# Altium PCB DM0249.PcbDoc (part 1 of 2)
Units mm, origin at the board's own origin, x right, y up, seen from the top; angles counter-clockwise.
Board outline 25 x 23.86 mm, 4 copper layers (Top Copper, Signal Layer 1, Layer 1, Bottom Layer), stack 1.602 mm thick; 50 components, 26 nets, 168 pads, 141 vias.
Unrouted connection lines stored in the file: 117.
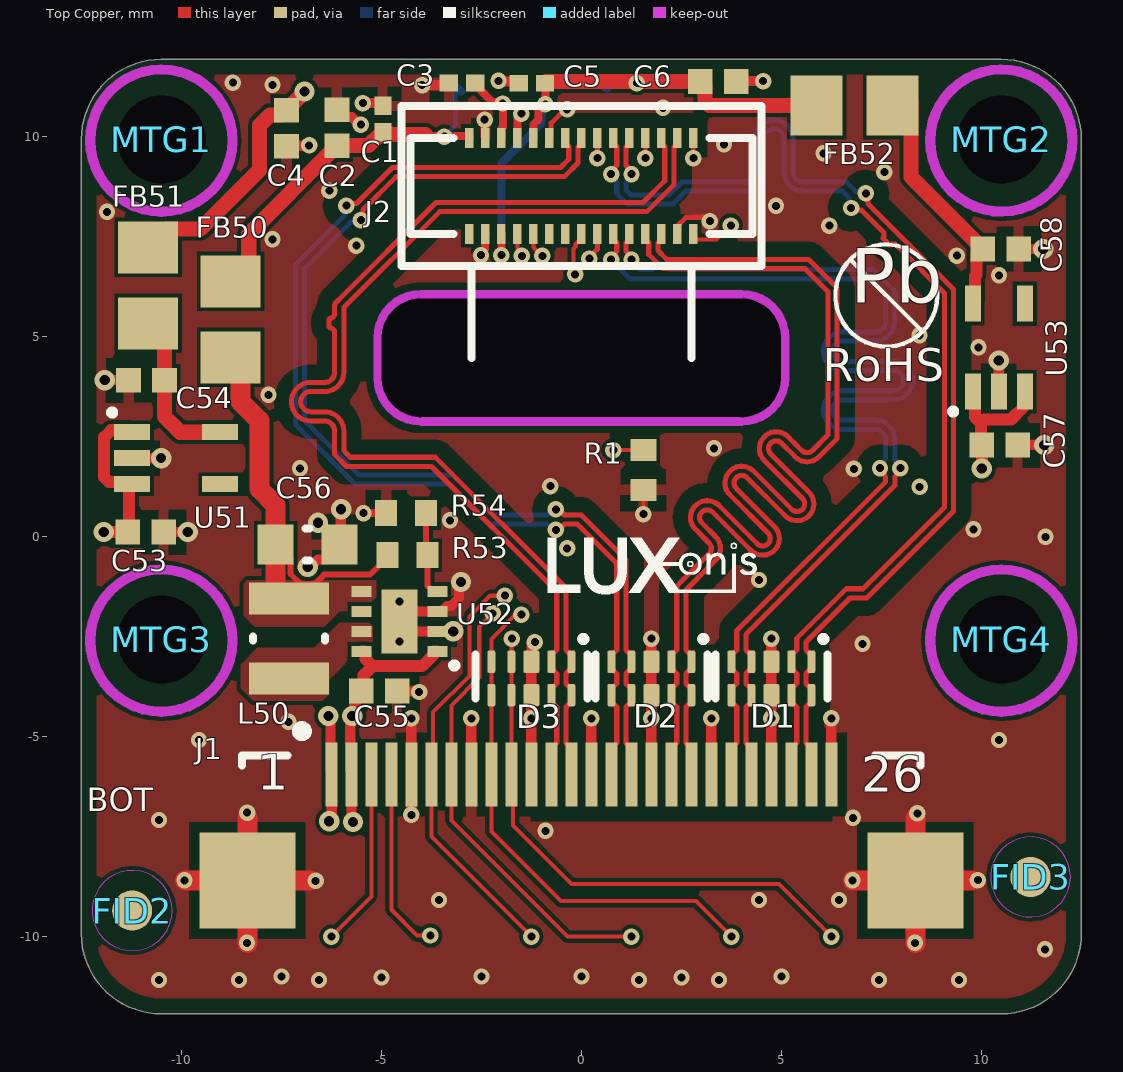
[diagram p0: Top Copper view]
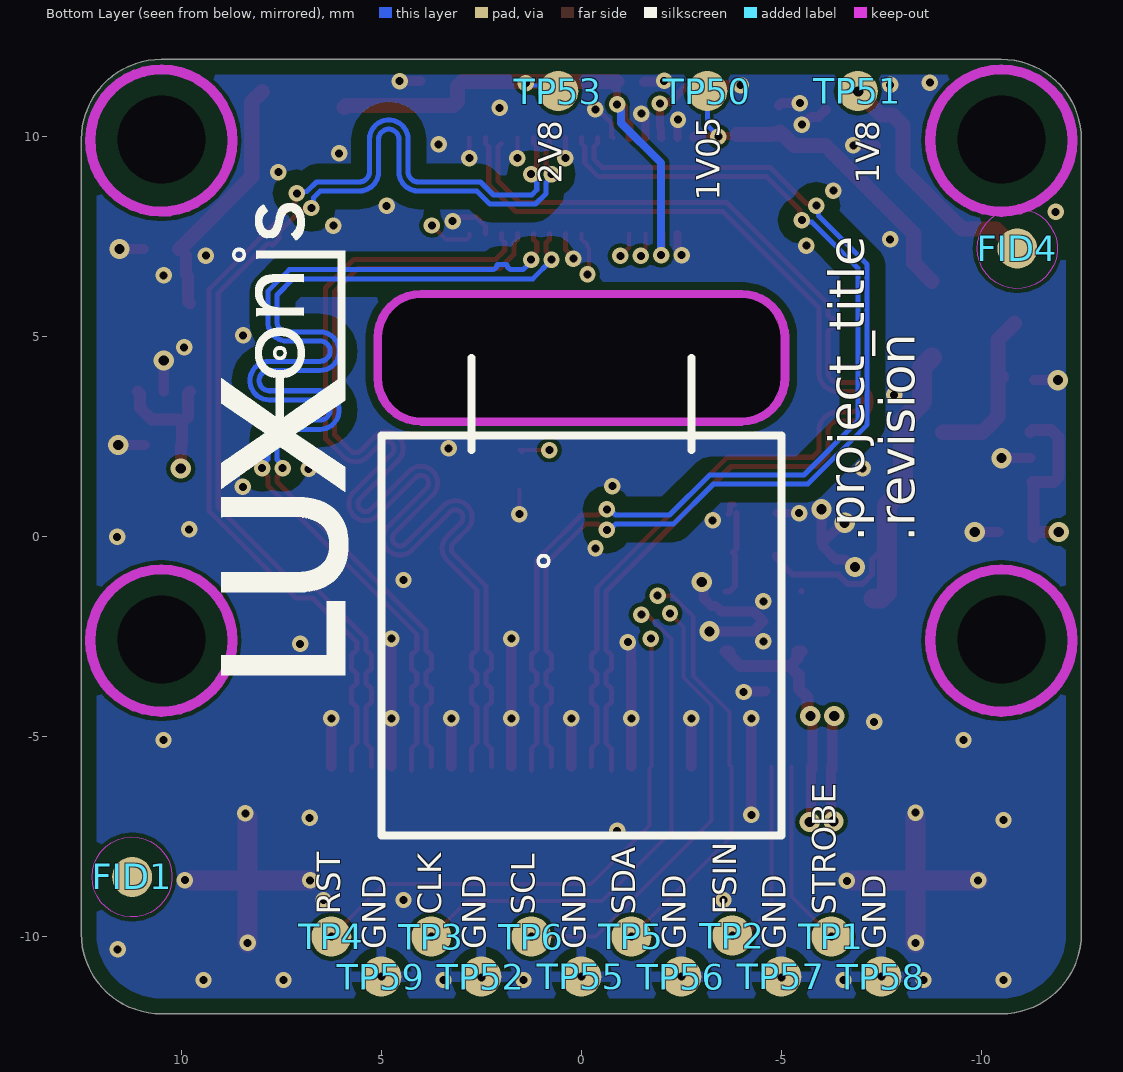
[diagram p1: Bottom Layer view, seen from below]
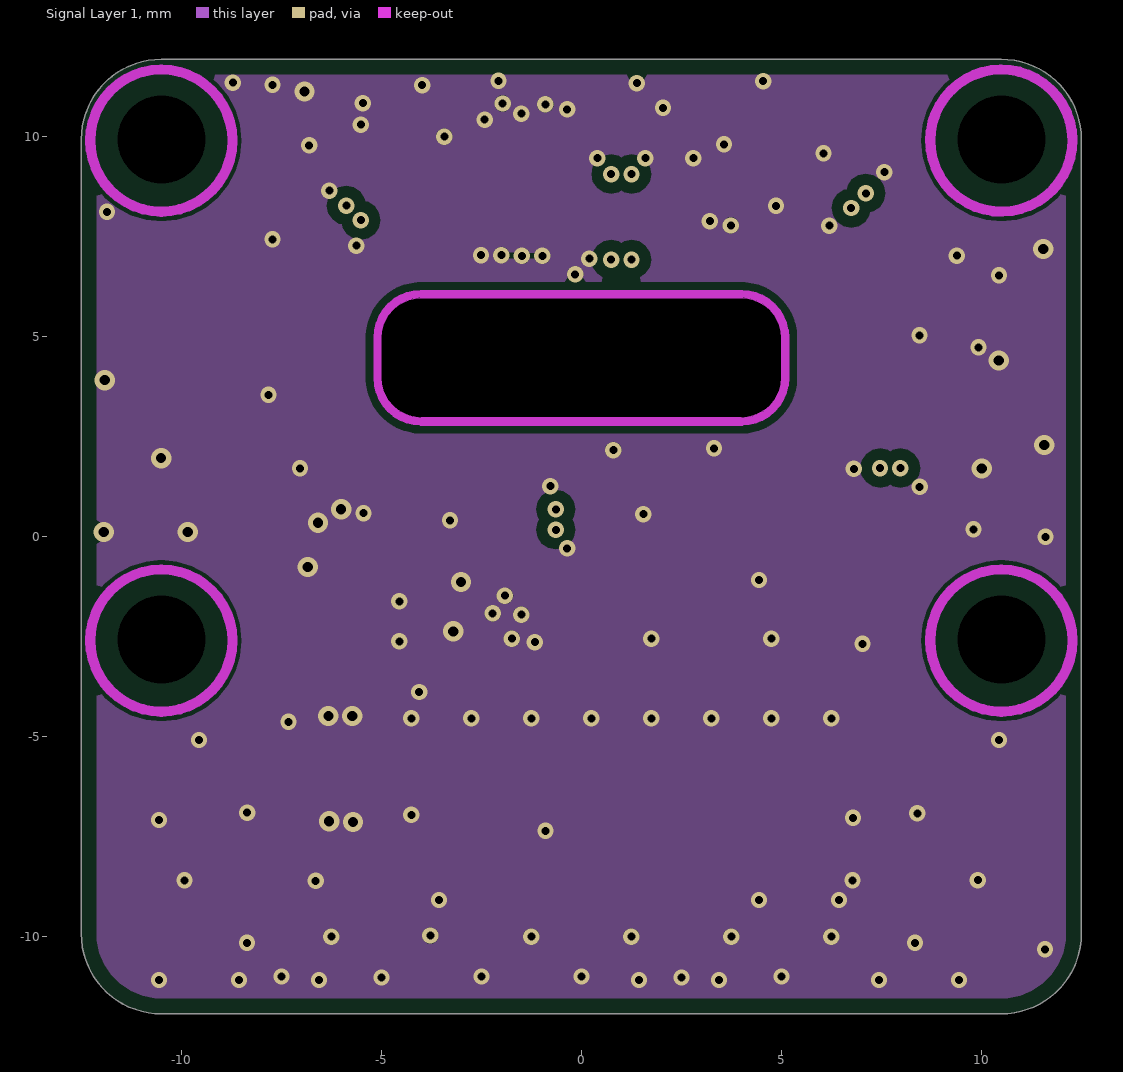
[diagram p2: Signal Layer 1]
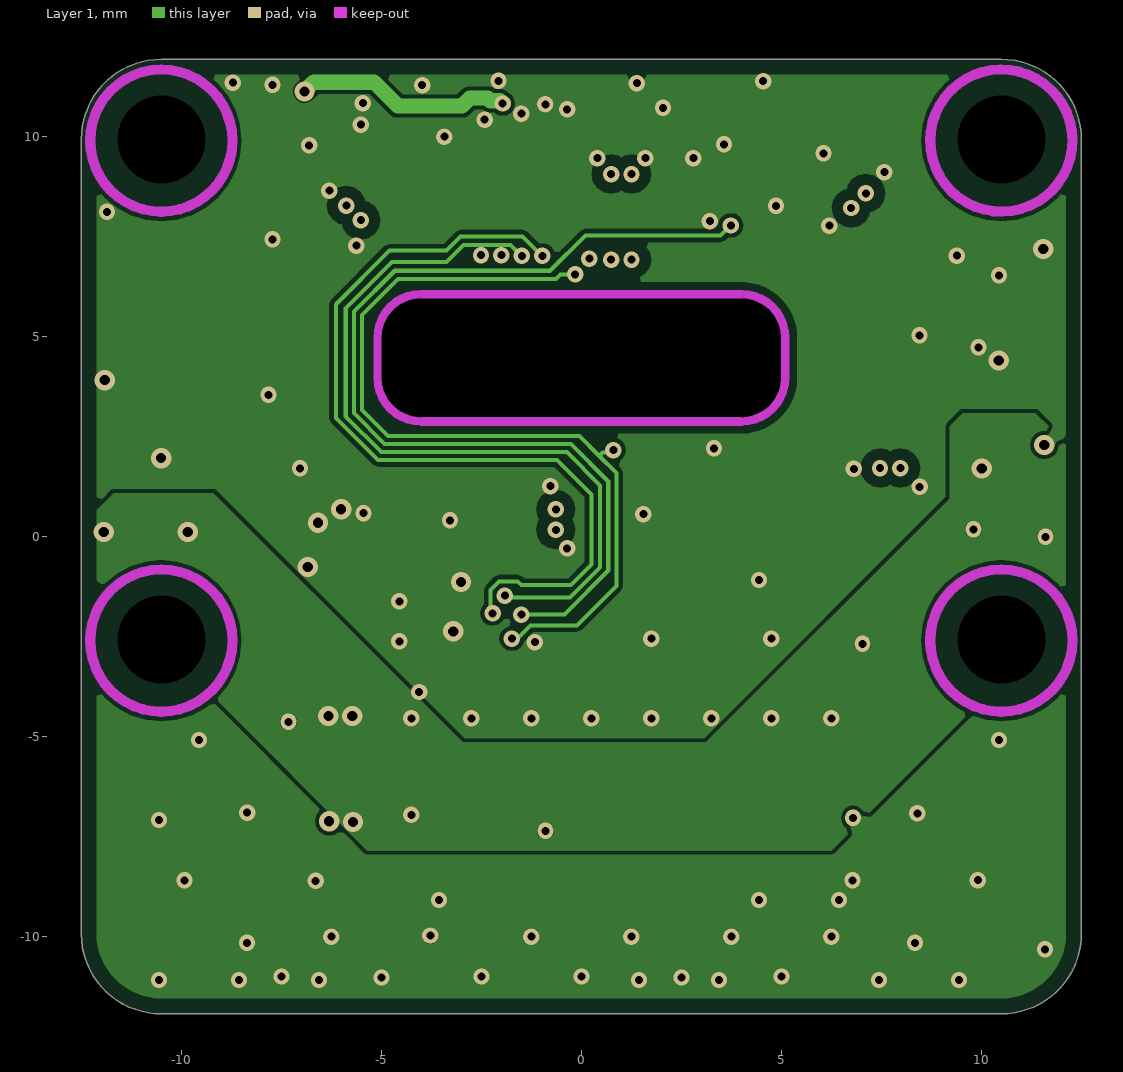
[diagram p3: Layer 1]

## Layer stack, top to bottom
Top Mask: solder mask 0.018, Solder Resist, Dk 4.2
Top Copper: signal copper 0.0356
Dielectric 1: prepreg 0.18, PP-021, Dk 4.2
Signal Layer 1: signal copper 0.0356
Core: core 1.1, Core-042, Dk 4.2
Layer 1: signal copper 0.0356
Dielectric 2: prepreg 0.18, PP-021, Dk 4.2
Bottom Layer: signal copper 0.0356
Bottom Solder: solder mask 0.018, Solder Resist, Dk 4.2

## Board outline
-12.5,-9.931 -12.5,9.931 cw(c-10.5,9.931) -10.5,11.931 10.5,11.931 cw(c10.5,9.931) 12.5,9.931 12.5,-9.931 cw(c10.5,-9.931) 10.5,-11.931 -10.5,-11.931 cw(c-10.5,-9.931)

## Design rules (kind name [scope] priority, off if disabled: settings)
AssemblyTestPointUsage [All] p1: valid=2
AssemblyTestpoint [(IsPad And (OnTopLayer Or OnBottomLayer)) Or (IsVia) Or (IsPad And OnMultiLayer)] p1: testpointundercomponent=FALSE minsize=0.381 maxsize=2.54 preferedsize=1.524 minholesize=0 maxholesize=2.54 preferedholesize=0.813 testpointgrid=0.025 usegrid=FALSE gridtolerance=0 allowsidebottom=TRUE
BoardOutlineClearance [not InPolygonClass('ToEdge')] p1: gap=0.381 ignorepadtopadclearanceinfootprint=FALSE
Clearance DIFF_PAIR_GND [InPolygon vs InAnyDifferentialPair] p1: gap=0.381 ignorepadtopadclearanceinfootprint=FALSE
Clearance [All] p2: gap=0.1 ignorepadtopadclearanceinfootprint=FALSE
ComponentClearance [HasFootprint('FIDUCIAL_ROUND_1MM') or HasFootprint('TP100_200_NS') vs HasFootprint('FIDUCIAL_ROUND_1MM') or HasFootprint('TP100_200_NS')] p1: gap=-0.003 collisioncheckmode=3 verticalgap=2540 showdistances=FALSE
DiffPairsRouting 90ohm [InDifferentialPairClass('USB3')] p1: maxlimit=0.254 minlimit=0.102 mostfreqgap=0.254 toplayer_maxgap=0.102 toplayer_prefgap=0.102 toplayer_minwidth=0.178 toplayer_maxwidth=0.178 toplayer_prefwidth=0.178 midlayer1_minwidth=0.381 midlayer1_maxwidth=0.381 midlayer1_prefwidth=0.381 midlayer2_minwidth=0.381 midlayer2_maxwidth=0.381 midlayer2_prefwidth=0.381 bottomlayer_maxgap=0.102 bottomlayer_prefgap=0.102 bottomlayer_minwidth=0.178 bottomlayer_maxwidth=0.178 bottomlayer_prefwidth=0.178 impedanceprofiledriven=TRUE impedanceprofileid={88523433-C968-46F5-BAB2-5A945F0074AC} maxuncoupledlength=12.7
DiffPairsRouting 100ohm [InDifferentialPairClass('100ohm')] p2: maxlimit=0.254 minlimit=0.102 mostfreqgap=0.254 toplayer_maxgap=0.102 toplayer_prefgap=0.102 toplayer_minwidth=0.127 toplayer_maxwidth=0.127 toplayer_prefwidth=0.127 midlayer1_minwidth=0.381 midlayer1_maxwidth=0.381 midlayer1_prefwidth=0.381 midlayer2_minwidth=0.381 midlayer2_maxwidth=0.381 midlayer2_prefwidth=0.381 bottomlayer_maxgap=0.102 bottomlayer_prefgap=0.102 bottomlayer_minwidth=0.127 bottomlayer_maxwidth=0.127 bottomlayer_prefwidth=0.127 impedanceprofiledriven=TRUE impedanceprofileid={23EE4AC3-2669-4576-8364-9EC6BF9A4921} maxuncoupledlength=12.7
FabricationTestPointUsage [All] p1: valid=2 allowmultiple=TRUE
FabricationTestpoint [(IsPad And (OnTopLayer Or OnBottomLayer)) Or (IsVia) Or (IsPad And OnMultiLayer)] p1: side=3 testpointundercomponent=TRUE minsize=0.508 maxsize=2.54 preferedsize=1.524 minholesize=0 maxholesize=1.016 preferedholesize=0.813 testpointgrid=0.025 allowsidetop=TRUE allowsidebottom=TRUE usegrid=FALSE gridtolerance=0
HoleSize [All] p1: absolutevalues=TRUE maxlimit=25.4 minlimit=0.2 maxpercent=80.000 minpercent=20.000
HoleToHoleClearance [All] p1: gap=0.254 allowstackedmicrovias=FALSE
MatchedLengths "Schematic Matched Net Lengths_1" [InDifferentialPairClass('All Differential Pairs')] p1: tolerance=0.127 checknetsindiffpair=TRUE checkdiffpairvsdiffpair=FALSE checkxsignals=FALSE checkothers=FALSE usedelayunits=TRUE delaytolerance=0.500000
MatchedLengths "Schematic Matched Net Lengths" [InDifferentialPairClass('All Differential Pairs')] p2: tolerance=0.025 checknetsindiffpair=FALSE checkdiffpairvsdiffpair=TRUE checkxsignals=TRUE checkothers=TRUE usedelayunits=TRUE delaytolerance=1.000000
MinimumSolderMaskSliver [not (HasFootprint('DF40HC-3.0-100DS-0.4V_minpad') or HasFootprint('TPD4E02B04DQAR') or HasFootprint('105450-0101'))] p1: minsoldermaskwidth=0.076
PolygonConnect PolygonConnect_PWR [All vs InNet('NetL50_1') or InNet('V_DCDC')] p1: connectstyle=Direct reliefconductorwidth=0.254 reliefentries=4 polygonreliefangle="90 Angle" airgapwidth=0.254
PolygonConnect [All] p2: thpad.connectstyle=Direct thpad.reliefconductorwidth=0.254 thpad.reliefentries=4 thpad.polygonreliefangle="90 Angle" thpad.airgapwidth=0.254 smdpad.connectstyle=Relief smdpad.reliefconductorwidth=0.254 smdpad.reliefentries=4 smdpad.polygonreliefangle="90 Angle" smdpad.airgapwidth=0.254 via.connectstyle=Direct via.reliefconductorwidth=0.254 via.reliefentries=4 via.polygonreliefangle="90 Angle" via.airgapwidth=0.254
RoutingVias [All] p1: holewidth=0.254 width=0.508 viastyle="Through Hole" minholewidth=0.2 minwidth=0.4 maxholewidth=25.4 maxwidth=25.4
SilkToSilkClearance [All] p1: silktosilkclearance=0.025
SilkToSolderMaskClearance [InPadClass('All Pads')] p1: minsilkscreentomaskgap=0 clearancetoexposedcopper=FALSE
SolderMaskExpansion [All] p1: expansion=0.102 istentingtop=FALSE
UnRoutedNet [All] p1: checkbadconnections=TRUE
Width [All] p1: maxlimit=1 minlimit=0.102 preferedwidth=0.254
18 further rules are at their usual default settings.

## Classes and differential pairs
component class DM0249_IMX378: C1 C2 C3 C4 C5 C6 D1 D2 D3 FID1 FID2 FID3 FID4 J1 J2 MTG1 MTG2 MTG3 MTG4 R1 TP1 TP2 TP3 TP4 TP5 TP6
component class DM0249_Power: C53 C54 C55 C56 C57 C58 FB50 FB51 FB52 L50 R53 R54 TP50 TP51 TP52 TP53 TP55 TP56 TP57 TP58 TP59 U51 U52 U53
net class SENSORMIPI: MIPI_C_N MIPI_C_P MIPI_D0_N MIPI_D0_P MIPI_D1_N MIPI_D1_P MIPI_D2_N MIPI_D2_P MIPI_D3_N MIPI_D3_P
differential pair MIPI_C: +MIPI_C_P -MIPI_C_N
differential pair MIPI_D0: +MIPI_D0_P -MIPI_D0_N
differential pair MIPI_D1: +MIPI_D1_P -MIPI_D1_N
differential pair MIPI_D2: +MIPI_D2_P -MIPI_D2_N
differential pair MIPI_D3: +MIPI_D3_P -MIPI_D3_N

## Components (designator, comment, footprint, x,y, rotation, side; value= is the part's Value field where it differs from the comment)
C1 "0.1uF 0201" CAPC0201(0603)33_N -4.96,10.436 r270 top
C2 "10uF 0402" CAPC0402(1005)70_N -6.11,10.22 r270 top
C3 "0.1uF 0201" CAPC0201(0603)33_N -2.98,11.337 r0 top
C4 "10uF 0402" CAPC0402(1005)70_N -7.37,10.21 r90 top
C5 "0.1uF 0201" CAPC0201(0603)33_N -1.238,11.334 r0 top
C6 "10uF 0402" CAPC0402(1005)70_N 3.425,11.375 r180 top
C53 "10uF 0402" CAPC0402(1005)70_N -10.887,0.112 r180 top
C54 "10uF 0402" CAPC0402(1005)70_N -10.87,3.91 r0 top
C55 "10uF 0402" CAPC0402(1005)70_N -5.05,-3.862 r180 top
C56 "22uF 0603" CAPC0603(1608)100_N -6.84,-0.2 r180 top
C57 "10uF 0402" CAPC0402(1005)70_N 10.462,2.288 r180 top
C58 "10uF 0402" CAPC0402(1005)70_N 10.487,7.19 r180 top
D1 "TPD4E02B04DQAR" TPD4E02B04DQAR 4.75,-3.548 r180 top
D2 "TPD4E02B04DQAR" TPD4E02B04DQAR 1.75,-3.548 r180 top
D3 "TPD4E02B04DQAR" TPD4E02B04DQAR -1.25,-3.548 r180 top
FB50 "600R/100MHz" 2508056017Y2 -8.77,5.43 r90 top
FB51 "600R/100MHz" 2508056017Y2 -10.83,6.28 r90 top
FB52 "600R/100MHz" 2508056017Y2 6.832,10.774 r180 top
FID1 "FIDUCIAL_ROUND_1MM" FIDUCIAL_ROUND_1MM 11.23,-8.51 r180 bottom
FID2 "FIDUCIAL_ROUND_1MM" FIDUCIAL_ROUND_1MM -11.23,-9.35 r90 top
FID3 "FIDUCIAL_ROUND_1MM" FIDUCIAL_ROUND_1MM 11.23,-8.51 r90 top
FID4 "FIDUCIAL_ROUND_1MM" FIDUCIAL_ROUND_1MM -10.9,7.2 r90 bottom
J1 "FLEX CONNECTOR, 0.50MM PITCH, HE" F32R-1A7H1-11026 0,-7.176 r0 top locked
J2 "24-5804-030-000-829+" A12N02A-201_1.6mmbrd_MatedModule 0,8.77 r180 top locked
L50 "1uH, 3.2A, 20%" DFE252012P-1R0M=P2 -7.31,-2.55 r90 top
MTG1 "" MOUNTING_HOLE_M2_RPI_CAM -10.5,9.931 r90 top locked
MTG2 "" MOUNTING_HOLE_M2_RPI_CAM 10.5,9.931 r90 top locked
MTG3 "" MOUNTING_HOLE_M2_RPI_CAM -10.5,-2.569 r90 top locked
MTG4 "" MOUNTING_HOLE_M2_RPI_CAM 10.5,-2.569 r90 top locked
R1 "10K 0402" RESC0402(1005)_N 1.55,1.663 r270 top
R53 "53.6k 0402" RESC0402(1005)_N -4.346,-0.467 r180 top
R54 "39.2k 0402" RESC0402(1005)_N -4.377,0.588 r0 top
TP1 "TP100_200_NS" TP100_200_NS -6.25,-10 r90 bottom
TP2 "TP100_200_NS" TP100_200_NS -3.775,-9.975 r90 bottom
TP3 "TP100_200_NS" TP100_200_NS 3.75,-10 r90 bottom
TP4 "TP100_200_NS" TP100_200_NS 6.25,-10 r90 bottom
TP5 "TP100_200_NS" TP100_200_NS -1.25,-10 r180 bottom
TP6 "TP100_200_NS" TP100_200_NS 1.25,-10 r180 bottom
TP50 "TP100_150_NS" TP100_150_NS -3.15,11.137 r0 bottom
TP51 "TP100_150_NS" TP100_150_NS -6.913,11.138 r180 bottom
TP52 "TP100_150_NS" TP100_150_NS 2.5,-11 r90 bottom
TP53 "TP100_150_NS" TP100_150_NS 0.575,11.138 r0 bottom
TP55 "TP100_150_NS" TP100_150_NS 0,-11 r90 bottom
TP56 "TP100_150_NS" TP100_150_NS -2.5,-11 r90 bottom
TP57 "TP100_150_NS" TP100_150_NS -5,-11 r90 bottom
TP58 "TP100_150_NS" TP100_150_NS -7.5,-11 r90 bottom
TP59 "TP100_150_NS" TP100_150_NS 5,-11 r90 bottom
U51 "TLV70018DCK" TLV70018DCK -10.13,1.96 r270 top
U52 "TLV62080DSG" TLV62080DSG -4.55,-2.12 r180 top
U53 "TLV70028DCK" TLV70028DCK 10.437,4.725 r0 top locked

## Footprints (in the part's own frame and the unit in brackets; to place one, negate y for a bottom-side part, rotate by r counter-clockwise, add the part's x,y. Pads: shape width x height; smd on the part's side, far side on the other; paste and mask are expansions set on the pad)
2508056017Y2 [mm] "2508056017Y2 Chip Inductor, 2-Leads, Body 2.00x1.25mm"
  rect 1.3x1.5 smd: 1(-0.95,0) 2(0.95,0)
  body extent -1.1,-0.72 1.1,0.73, height 1.45
A12N02A-201_1.6mmbrd_MatedModule [mm] "connector: 24-5804-030-000-829+ (1.4mm height w/ module mated)"
  rect 0.22x0.5 smd mask+0.05: 1(-2.8,-1.2) 2(-2.4,-1.2) 3(-2,-1.2) 4(-1.6,-1.2) 5(-1.2,-1.2) 6(-0.8,-1.2) 7(-0.4,-1.2) 8(0,-1.2) 9(0.4,-1.2) 10(0.8,-1.2) 11(1.2,-1.2) 12(1.6,-1.2) 13(2,-1.2) 14(2.4,-1.2) 15(2.8,-1.2) 16(2.8,1.2) 17(2.4,1.2) 18(2,1.2) 19(1.6,1.2) 20(1.2,1.2) 21(0.8,1.2) 22(0.4,1.2) 23(0,1.2) 24(-0.4,1.2) 25(-0.8,1.2) 26(-1.2,1.2) 27(-1.6,1.2) 28(-2,1.2) 29(-2.4,1.2) 30(-2.8,1.2)
  Bottom Layer keep-out region: -4.999,16.237 4.999,16.237 4.999,6.239 -4.999,6.239
  Keep-Out Layer board cut-out: -5,4.8 -4.924,5.183 -4.707,5.507 -4.383,5.724 -4,5.8 -4,5.8 4,5.8 4.383,5.724 4.707,5.507 4.924,5.183 5,4.8 5,4.8 5,3.8 4.924,3.417 4.707,3.093 4.383,2.876 4,2.8 4,2.8 -4,2.8 -4.383,2.876 -4.707,3.093 -4.924,3.417 -5,3.8 -5,3.8
  Keep-Out Layer lines w0.2: 5.1,4.8 ccw(c4,4.8) 4,5.9 -4,5.9 ccw(c-4,4.8) -5.1,4.8 -5.1,3.8 ccw(c-4,3.8) -4,2.7 0,2.7 4,2.7 ccw(c4,3.8) 5.1,3.8 5.1,4.8
  silkscreen extent -4.5,-2 4.5,4.3, body extent -5,-5.72 5,16.24, height 6.18
CAPC0201(0603)33_N [mm] "Chip Capacitor, Body 0.6x0.3mm, Height 0.33mm, IPC Medium Density"
  rect 0.46x0.42 smd: 1(-0.33,0) 2(0.33,0)
  body extent -0.31,-0.16 0.32,0.17, height 0.33
CAPC0402(1005)70_N [mm] "Chip Capacitor, Body 1.0x0.5mm, Height 0.7mm, IPC Medium Density"
  rect 0.62x0.62 smd: 1(-0.45,0) 2(0.45,0)
  body extent -0.55,-0.3 0.55,0.3, height 0.7
CAPC0603(1608)100_N [mm] "Chip Capacitor, Body 1.6x0.8mm, Height 1.0mm, IPC Medium Density"
  rect 0.9x1 smd: 1(-0.8,0) 2(0.8,0)
  silkscreen extent -0.05,-0.4 0.05,0.4, body extent -0.87,-0.48 0.88,0.47, height 1
DFE252012P-1R0M=P2 [mm] "Chip Inductor, 2-Leads, Body 2.40x2.00mm, IPC High Density"
  rect 0.8x2 smd: 1(-1,0) 2(1,0)
  silkscreen extent -0.05,-0.9 0.05,0.9, body extent -1.25,-1.1 1.25,1.1, height 1.2
F32R-1A7H1-11026 [mm] "26pin Molex FFC 0.5mm Bottom"
  rect 0.3x1.6 smd: 1(-6.25,1.225) 2(-5.75,1.225) 3(-5.25,1.225) 4(-4.75,1.225) 5(-4.25,1.225) 6(-3.75,1.225) 7(-3.25,1.225) 8(-2.75,1.225) 9(-2.25,1.225) 10(-1.75,1.225) 11(-1.25,1.225) 12(-0.75,1.225) 13(-0.25,1.225) 14(0.25,1.225) 15(0.75,1.225) 16(1.25,1.225) 17(1.75,1.225) 18(2.25,1.225) 19(2.75,1.225) 20(3.25,1.225) 21(3.75,1.225) 22(4.25,1.225) 23(4.75,1.225) 24(5.25,1.225) 25(5.75,1.225) 26(6.25,1.225)
  rect 2.4x2.4 smd: MP1(-8.35,-1.425) MP2(8.35,-1.425)
  silkscreen extent -8.49,1.45 8.49,2.44, body extent -10.16,-4.47 10.14,1.03, height 15.15
FIDUCIAL_ROUND_1MM [mm] "Round, 1mm dia"
  round 1 smd paste-1 mask+0.5: 1(0,0)
  Top Copper keep-out circle w0.025: c0,0 r1
MOUNTING_HOLE_M2_RPI_CAM [mil] "NPTH 2.2mm Hole Used in Raspberry Pi Camera"
  round 60 hole 86.61 unplated: 1(0,0)
RESC0402(1005)_N [mm] "Chip Resistor, Body 1.0x0.5mm, IPC Medium Density"
  rect 0.55x0.65 smd: 1(-0.5,0) 2(0.5,0)
  body extent -0.52,-0.27 0.53,0.28, height 0.4
TLV62080DSG [mm] "WSON-8, 2.1mm x 2.1mm x 0.8mm"
  rect 0.5x0.28 smd mask+0.07: 1(-0.95,0.75) 2(-0.95,0.25) 3(-0.95,-0.25) 4(-0.95,-0.75) 5(0.95,-0.75) 6(0.95,-0.25) 7(0.95,0.25) 8(0.95,0.75)
  rect 0.9x1.6 smd mask+0.07: 9(0,0)
  silkscreen extent -1.4,1.07 -1.35,1.13, body extent -1.05,-1.05 1.05,1.05, height 0.8
TLV70018DCK [mm] "SC70-5 1.1mm"
  rect 0.4x0.9 smd paste-0.025 mask+0.05: 1(-0.65,-1.1) 2(0,-1.1) 3(0.65,-1.1) 4(0.65,1.1) 5(-0.65,1.1)
  silkscreen extent -1.17,-1.63 -1.12,-1.57, body extent -1.1,-1.2 1.1,1.2, height 1.1
TLV70028DCK [mm] "SC70-5 1.1mm"
  rect 0.4x0.9 smd paste-0.025 mask+0.05: 1(-0.65,-1.1) 2(0,-1.1) 3(0.65,-1.1) 4(0.65,1.1) 5(-0.65,1.1)
  silkscreen extent -1.17,-1.63 -1.12,-1.57, body extent -1.1,-1.2 1.1,1.2, height 1.1
TP100_150_NS [mm] "1mm dia pad, 1.5mm clearance, no silk screen"
  round 1 smd paste-2: 1(0,0)
TP100_200_NS [mm] "1mm dia pad, 2mm dia clearance, no silk screen"
  round 1 smd paste-2: 1(0,0)
TPD4E02B04DQAR [mm] "TPD4E02B04DQAR"
  rrect50% 0.2x0.565 smd mask+0.07: 1(-1,-0.417) 2(-0.5,-0.417) 4(0.5,-0.417) 5(1,-0.417) 6(1,0.417) 7(0.5,0.417) 9(-0.5,0.417) 10(-1,0.417)
  rrect25% 0.4x0.565 smd mask+0.07: 3(0,-0.417) 8(0,0.417)
  silkscreen extent -1.4,-1.01 1.4,0.5, body extent -1.2,-0.71 1.2,0.71, height 0.55

## Part data
C1 C3 C5: library part GRM033R61A104KE15D, "CAP CER 0.1UF 10V X5R 0201", Capacitance=100nF, Case Code (Imperial)=0201, Case Code (Metric)=0603, Dielectric=X5R, Manufacturer 1=Murata, Max Operating Temperature=85°C, Min Operating Temperature=-55°C, Package Quantity=1, Supplier Part Number 1=490-5881-1-ND, Tolerance=10%, Voltage=10V, Case/Package=0201, ComponentLink1Description=https://datasheet.ciiva.com/26843/getdatasheetpartid-308656-26843739.pdf?src-supplier=Verical, ComponentLink1URL=https://datasheet.ciiva.com/26843/getdatasheetpartid-308656-26843739.pdf?src-supplier=Verical, ComponentLink2Description=https://datasheet.ciiva.com/5413/product-5413117.pdf?src-supplier=Mouser, ComponentLink2URL=https://datasheet.ciiva.com/5413/product-5413117.pdf?src-supplier=Mouser, ComponentLink3Description=https://datasheet.ciiva.com/6256/partnumbering-e-01-6256406.pdf?src-supplier=Digi-Key, ComponentLink3URL=https://datasheet.ciiva.com/6256/partnumbering-e-01-6256406.pdf?src-supplier=Digi-Key, ComponentLink4Description=https://datasheet.ciiva.com/6256/partnumbering-e-01-6256407.pdf?src-supplier=Digi-Key, ComponentLink4URL=https://datasheet.ciiva.com/6256/partnumbering-e-01-6256407.pdf?src-supplier=Digi-Key, ComponentLink5Description=https://datasheet.ciiva.com/6256/partnumbering-e-01-6256408.pdf?src-supplier=Digi-Key, ComponentLink5URL=https://datasheet.ciiva.com/6256/partnumbering-e-01-6256408.pdf?src-supplier=Digi-Key, Depth=0.3mm, Height=0.3mm, Lead Free="Lead Free", Length=0.6mm, Manufacturer Part Number 1=GRM033R61A104KE15D, Mount="Surface Mount", Packaging="Tape and Reel", Pricing 1="1=0.10000, 10=0.04200, 100=0.01860, 500=0.01330, 1000=0.01045, 2500=0.00950, 5000=0.00874 (USD)", Radiation Hardening=No, REACH SVHC="No SVHC", RoHS=Yes, Stock 1=45335312, Supplier 1=Digi-Key, Termination=SMD/SMT, Thickness=0.013inch, Voltage Rating=10V, Voltage Rating (DC)=10V, Weight=6E-06oz, Width=0.012inch
C2 C4 C6 C53 C54 C55 C57 C58: library part GRM155R60J106ME15D, "CAP CER 10UF 6.3V X5R 0402 20%", Capacitance=10uF, Case Code (Imperial)=0402, Case Code (Metric)=1005, Dielectric=X5R, Manufacturer 1=Murata, Max Operating Temperature=85°C, Min Operating Temperature=-55°C, Supplier Part Number 1=490-13238-1-ND, Tolerance=20%, Voltage Rating=6.3V, Case/Package=0402, ComponentLink1Description=https://www.murata.com/~/media/webrenewal/support/library/catalog/products/capacitor/mlcc/c02e.ashx?la=en-us&src-supplier=Digi-Key, ComponentLink1URL=https://www.murata.com/~/media/webrenewal/support/library/catalog/products/capacitor/mlcc/c02e.ashx?la=en-us&src-supplier=Digi-Key, Length=0.039inch, Manufacturer Part Number 1=GRM155R60J106ME15D, Mount="Surface Mount", Packaging="Tape and Reel", Pricing 1="1=0.23000, 10=0.15700, 100=0.07950, 500=0.05442, 1000=0.04814, 2500=0.04605, 5000=0.04186 (USD)", RoHS=Yes, Stock 1=1839627, Supplier 1=Digi-Key, Thickness=0.026inch, Voltage Rating (DC)=6.3V, Width=0.02inch
C56: library part GRM188R61A226ME15D, "CAP CER 22UF 10V X5R 0603 20%", Capacitance=22uF, Case/Package=0603, Case Code (Metric)=1608, Dielectric=X5R, Manufacturer 1=Murata, Max Operating Temperature=85°C, Min Operating Temperature=-55°C, Package Quantity=4000, Supplier Part Number 1=490-10476-1-ND, Tolerance=20%, Voltage Rating=10V, Case Code (Imperial)=0603, ComponentLink1Description=https://datasheet.ciiva.com/46444/1769893-46444975.pdf?src-supplier=Element14, ComponentLink1URL=https://datasheet.ciiva.com/46444/1769893-46444975.pdf?src-supplier=Element14, Depth=0.8mm, Height=0.8mm, Lead Free="Lead Free", Length=1.6mm, Manufacturer Part Number 1=GRM188R61A226ME15D, Material=Ceramic, Mount="Surface Mount", Packaging="Tape and Reel", Pricing 1="1=0.31000, 10=0.21500, 100=0.12160, 500=0.08584, 1000=0.07512 (USD)", REACH SVHC="No SVHC", RoHS=Yes, Stock 1=984716, Supplier 1=Digi-Key, Termination=SMD/SMT, Thickness=0.039inch, Voltage Rating (DC)=10V, Weight=0.000222oz, Width=0.8mm
D1 D2 D3: "TVS DIODE 3.6V 8.8V 10USON 8.8V (Typ) Clamp 5A (8/20µs) Ipp Tvs Diode Surface Mount 10-USON (2.5x1)", Clamping Voltage=8.8V, Manufacturer 1="Texas Instruments", Max Operating Temperature=125°C, Min Breakdown Voltage=5.5V, Min Operating Temperature=-40°C, Operating Supply Voltage=3.6V, Peak Pulse Current=5A, Peak Pulse Power=17W, Power Line Protection=No, Supplier Part Number 1=296-43875-1-ND, ComponentLink1Description=http://www.ti.com/general/docs/lit/getliterature.tsp?genericPartNumber=TPD4E02B04&amp;&amp;fileType=pdf&src-supplier=Element14, ComponentLink1URL=http://www.ti.com/general/docs/lit/getliterature.tsp?genericPartNumber=TPD4E02B04&amp;&amp;fileType=pdf&src-supplier=Element14, ComponentLink2Description=http://www.ti.com/lit/ds/symlink/tpd4e02b04.pdf?src-supplier=Farnell, ComponentLink2URL=http://www.ti.com/lit/ds/symlink/tpd4e02b04.pdf?src-supplier=Farnell, ComponentLink3Description=http://www.ti.com/lit/ds/symlink/tpd4e02b04.pdf?src-supplier=Newark, ComponentLink3URL=http://www.ti.com/lit/ds/symlink/tpd4e02b04.pdf?src-supplier=Newark, ComponentLink4Description=http://www.ti.com/lit/ds/symlink/tpd4e02b04.pdf?src-supplier=Digi-Key, ComponentLink4URL=http://www.ti.com/lit/ds/symlink/tpd4e02b04.pdf?src-supplier=Digi-Key, Composition=Zener, Interface=USB,HDMI, Lead Free="Lead Free", Manufacturer Part Number 1=TPD4E02B04DQAR, Mount="Surface Mount", Number of Bidirectional Channels=4, Number of Channels=4, Number of Pins=10, Packaging="Cut Tape", Pricing 1="1=0.69000, 10=0.60800, 100=0.46650, 500=0.36874, 1000=0.29499 (USD)", REACH SVHC="No SVHC", Reverse Standoff Voltage=3.6V, RoHS=Yes, Stock 1=25615, Supplier 1=Digi-Key
FB50 FB51 FB52: library part 2508056017Y2, "FERRITE BEAD, 0.1OHM, 2A, 0805, 600R/100MHz", Case/Package=0805, Case Code (Metric)=2012, Current Rating=2A, DC Resistance (DCR)=100mR, Frequency=100MHz, Manufacturer 1=Fair-Rite, Max Operating Temperature=125°C, Min Operating Temperature=-55°C, Package Quantity=4000, Resistance=350mR, Supplier Part Number 1=1934-1487-1-ND, Tolerance=25%, Case Code (Imperial)=0805, ComponentLink1Description=https://datasheet.ciiva.com/3854/3802508056017y2-3854245.pdf?src-supplier=Arrow, ComponentLink1URL=https://datasheet.ciiva.com/3854/3802508056017y2-3854245.pdf?src-supplier=Arrow, ComponentLink2Description=https://datasheet.ciiva.com/22735/652149-22735047.pdf?src-supplier=Element14, ComponentLink2URL=https://datasheet.ciiva.com/22735/652149-22735047.pdf?src-supplier=Element14, ComponentLink3Description=https://datasheet.ciiva.com/1127/26143-1127514.pdf?src-supplier=Farnell, ComponentLink3URL=https://datasheet.ciiva.com/1127/26143-1127514.pdf?src-supplier=Farnell, ComponentLink4Description=https://datasheet.ciiva.com/18090/getdatasheetpartid-212640-18090187.pdf?src-supplier=Verical, ComponentLink4URL=https://datasheet.ciiva.com/18090/getdatasheetpartid-212640-18090187.pdf?src-supplier=Verical, ComponentLink5Description=https://datasheet.ciiva.com/7620/26143-7620140.pdf?src-supplier=Element14, ComponentLink5URL=https://datasheet.ciiva.com/7620/26143-7620140.pdf?src-supplier=Element14, DC Current=2A, Depth=1.25mm, Height=0.9mm, Impedance=600R, Length=2mm, Manufacturer Part Number 1=2508056017Y2, Max DC Current=2A, Military Standard=Not, Number of Pins=2, Packaging="Tape and Reel", Pricing 1="1=0.10000, 10=0.07900, 25=0.07120, 50=0.05240, 100=0.04520, 250=0.03568, 500=0.03014, 1000=0.02538 (USD)", Radiation Hardening=No, REACH SVHC="No SVHC", RoHS=Yes, Stock 1=100491, Supplier 1=Digi-Key, Termination=SMD/SMT, Test Frequency=100MHz, Width=1.25mm
FID1 FID2 FID3 FID4: library part FIDUCIAL, "Fiducial with various available footprints"
J1: library part F32R-1A7H1-11026, "26 Position FFC, FPC Connector Contacts, Bottom 0.020\" (0.50mm) Surface Mount, Right Angle", Current Rating=500mA, Flammability Rating="UL94 V-0", Manufacturer 1="Amphenol ICC (FCI)", Max Operating Temperature=105°C, Min Operating Temperature=-40°C, Voltage Rating=50V, Category=Connectors, ComponentLink1Description=https://cdn.amphenol-icc.com/media/wysiwyg/files/drawing/f32r-f32j.pdf, ComponentLink1URL=https://cdn.amphenol-icc.com/media/wysiwyg/files/drawing/f32r-f32j.pdf, Contact Material=Bronze, Contact Plating=Tin, Manufacturer Part Number 1=F32R-1A7H1-11026, Mount="Surface Mount", Number of Positions=26, Packaging="Tape and Reel", Pitch=0.02inch, Pricing 1="1=0.77, 10=0.721, 100=0.5529, 500=0.4808 (USD)", RoHS=Yes, Stock 1=1709, Supplier 1=Digi-Key, Termination=Solder
J2: library part A12N02A-201_Connector, "CONN Series 5804 board to board 0.4mm pitch 30 way connector", Manufacturer 1="Kyocera International Electronic Components", Manufacturer Part Number 1=245804030000829+, Supplier Part Number 1=478-12013-1-ND, ComponentLink1Description=http://global.kyocera.com/prdct/electro/product/pdf/5804.pdf?src-supplier=Digi-Key, ComponentLink1URL=http://global.kyocera.com/prdct/electro/product/pdf/5804.pdf?src-supplier=Digi-Key, MAN=AVX/KYOCERA, MAN PN=24-5804-030-000-829+, Pricing 1="1=1.69000, 10=1.53600, 25=1.44200, 50=1.37940, 100=1.31670, 250=1.19132, 500=1.09726, 1000=0.94050 (USD)", RoHS=Yes, Stock 1=11469, Supplier 1=Digi-Key
L50: library part DFE252012P-1R0M=P2, "FIXED IND 1UH 3.2A 42 MOHM SMD", Case/Package=1008, Case Code (Metric)=2520, Current Rating=4.3A, DC Resistance (DCR)=42mR, Inductance=1uH, Manufacturer=Murata, Manufacturer Part Number=DFE252012P-1R0M=P2, Max DC Current=3.2A, Max Operating Temperature=125°C, Min Operating Temperature=-40°C, Supplier Part Number 1=490-10647-1-ND, Test Frequency=1MHz, Tolerance=20%, Case Code (Imperial)=1008, ComponentLink1Description=http://www.farnell.com/datasheets/2550134.pdf?src-supplier=Farnell, ComponentLink1URL=http://www.farnell.com/datasheets/2550134.pdf?src-supplier=Farnell, ComponentLink2Description=https://www.murata.com/~/media/webrenewal/products/inductor/chip/tokoproducts/wirewoundmetalalloychiptype/m_dfe252012p.ashx?src-supplier=Digi-Key, ComponentLink2URL=https://www.murata.com/~/media/webrenewal/products/inductor/chip/tokoproducts/wirewoundmetalalloychiptype/m_dfe252012p.ashx?src-supplier=Digi-Key, ComponentLink3Description=http://www.murata.com/~/media/webrenewal/products/inductor/chip/tokoproducts/wirewoundmetalalloychiptype/m_dfe252012p.ashx?src-supplier=Digi-Key, ComponentLink3URL=http://www.murata.com/~/media/webrenewal/products/inductor/chip/tokoproducts/wirewoundmetalalloychiptype/m_dfe252012p.ashx?src-supplier=Digi-Key, ComponentLink4Description=http://www.toko.co.jp/products/pdf/inductors/dfe252012p.pdf?src-supplier=Avnet, ComponentLink4URL=http://www.toko.co.jp/products/pdf/inductors/dfe252012p.pdf?src-supplier=Avnet, Composition=Wirewound, Core Material=Ferrite, Depth=2mm, Height - Seated (Max)=0.039inch, Length=0.098inch, Manufacturer 1=Murata, Manufacturer 2=Murata, Manufacturer 3=Murata, Manufacturer 4=Murata, Manufacturer Part Number 1=DFE252012P-1R0M=P2, Manufacturer Part Number 2=DFE252012P-1R0M=P2, Manufacturer Part Number 3=DFE252012P-1R0M=P2, Manufacturer Part Number 4=DFE252012P-1R0M=P2, Mount="Surface Mount", Packaging="Tape and Reel", Pricing 1="1=0.43000, 10=0.37800, 100=0.27030, 500=0.22702, 1000=0.18377 (USD)", Pricing 2="1=0.43000, 10=0.37800, 100=0.27030, 500=0.22702, 1000=0.18377 (USD)", Pricing 3="1=0.43000, 10=0.37900, 50=0.37900, 100=0.27000, 1000=0.18400, 10000=0.14600 (USD)", Pricing 4="1=0.64000, 10=0.56500, 100=0.40500, 500=0.34000, 1000=0.27500 (SGD)", RoHS=Yes, Shielding=Shielded, Stock 1=2560, Stock 2=95, Stock 3=667, Stock 4=41, Supplier 1=Digi-Key, Supplier 2=Digi-Key, Supplier 3=Mouser, Supplier 4=Element14, Supplier Part Number 2=490-10647-6-ND, Supplier Part Number 3=81-DFE252012P-1R0MP2, Supplier Part Number 4=2530071, Width=0.079inch
MTG1 MTG2 MTG3 MTG4: "=CurrentFootprint", B - Value="Not a Part", A - Level=0
R1: library part RC0402FR-1310KL, "RES SMD 10K OHM 1% 0402 1/16W Chip Resistor, 0402 [1005 Metric], 10 kohm, RC Series, 50 V, Thick Film, 62.5 mW", Case Code (Imperial)=0402, Case Code (Metric)=1005, Manufacturer 1=Yageo, Max Operating Temperature=155°C, Min Operating Temperature=-55°C, Power Rating=62.5mW, Resistance=10kR, Supplier Part Number 1=67R9960, Temperature Coefficient=100ppm/°C, Tolerance=1%, Voltage Rating=50V, Case/Package=0402, ComponentLink1Description=https://datasheet.ciiva.com/16940/pyu-rc0402-51-rohs-l-6-16940293.pdf?src-supplier=Avnet+Europe, ComponentLink1URL=https://datasheet.ciiva.com/16940/pyu-rc0402-51-rohs-l-6-16940293.pdf?src-supplier=Avnet+Europe, ComponentLink2Description=https://datasheet.ciiva.com/28386/pyu-rc0402-51-rohs-l-6-28386855.pdf?src-supplier=Avnet+Europe, ComponentLink2URL=https://datasheet.ciiva.com/28386/pyu-rc0402-51-rohs-l-6-28386855.pdf?src-supplier=Avnet+Europe, ComponentLink3Description=https://datasheet.ciiva.com/16740/pyu-rc0402-51-rohs-l-6-r-16740602.pdf?src-supplier=Future+Electronics, ComponentLink3URL=https://datasheet.ciiva.com/16740/pyu-rc0402-51-rohs-l-6-r-16740602.pdf?src-supplier=Future+Electronics, ComponentLink4Description=https://datasheet.ciiva.com/8891/pyu-rc0402-51-rohs-l-6-8891339.pdf?src-supplier=Avnet, ComponentLink4URL=https://datasheet.ciiva.com/8891/pyu-rc0402-51-rohs-l-6-8891339.pdf?src-supplier=Avnet, ComponentLink5Description=https://datasheet.ciiva.com/5557/pyu-rc0402-51-rohs-l-6-r-5557997.pdf?src-supplier=Mouser, ComponentLink5URL=https://datasheet.ciiva.com/5557/pyu-rc0402-51-rohs-l-6-r-5557997.pdf?src-supplier=Mouser, ComponentLink6Description=https://datasheet.ciiva.com/7983/1018594-7983533.pdf?src-supplier=Element14, ComponentLink6URL=https://datasheet.ciiva.com/7983/1018594-7983533.pdf?src-supplier=Element14, Composition="Thick Film", Contact Plating=Tin,Matte,Lead, Depth=0.5mm, Lead Free="Lead Free", Length=1mm, Manufacturer Part Number 1=RC0402FR-1310KL, Military Standard=Not, Number of Pins=2, Number of Terminations=2, Packaging="Tape and Reel", Pricing 1="1=0.10000, 25=0.01200, 100=0.00400, 250=0.00400, 500=0.00300, 1000=0.00300 (USD)", Radiation Hardening=No, REACH SVHC="No SVHC", RoHS=Yes, Stock 1=62239, Supplier 1=Newark, Supplier 2="Future Electronics", Supplier 3=Mouser, Supplier 4=Element14, Supplier Part Number 2=RC0402FR-1310KL-CUTT, Supplier Part Number 3=603-RC0402FR-1310KL, Supplier Part Number 4=1799235, Termination=SMD/SMT, Voltage Rating (DC)=50V, Working Voltage=50V
R53: library part CRCW040253K6FKED, "RES SMD 53.6K OHM 1% 1/16W 0402", Case/Package=0402, Case Code (Metric)=1005, Manufacturer 1=Vishay, Max Operating Temperature=155°C, Max Power Dissipation=63mW, Min Operating Temperature=-55°C, Package Quantity=10, Resistance=53.6kR, Supplier Part Number 1=541-53.6KLCT-ND, Temperature Coefficient=100ppm/°C, Tolerance=1%, Voltage Rating=50V, Case Code (Imperial)=0402, ComponentLink1Description=https://datasheet.ciiva.com/5542/dcrcwe3-109170-5542453.pdf?src-supplier=Mouser, ComponentLink1URL=https://datasheet.ciiva.com/5542/dcrcwe3-109170-5542453.pdf?src-supplier=Mouser, ComponentLink2Description=https://datasheet.ciiva.com/7815/1697337-7815992.pdf?src-supplier=Element14, ComponentLink2URL=https://datasheet.ciiva.com/7815/1697337-7815992.pdf?src-supplier=Element14, ComponentLink3Description=https://datasheet.ciiva.com/7815/1697337-7815993.pdf?src-supplier=Element14, ComponentLink3URL=https://datasheet.ciiva.com/7815/1697337-7815993.pdf?src-supplier=Element14, ComponentLink4Description=https://datasheet.ciiva.com/16208/dcrcwe3-16208556.pdf?src-supplier=Future+Electronics, ComponentLink4URL=https://datasheet.ciiva.com/16208/dcrcwe3-16208556.pdf?src-supplier=Future+Electronics, ComponentLink5Description=https://datasheet.ciiva.com/2464/dcrcwe3-2464093.pdf?src-supplier=Digi-Key, ComponentLink5URL=https://datasheet.ciiva.com/2464/dcrcwe3-2464093.pdf?src-supplier=Digi-Key, ComponentLink6Description=https://datasheet.ciiva.com/2464/dcrcwe3-2464094.pdf?src-supplier=Digi-Key, ComponentLink6URL=https://datasheet.ciiva.com/2464/dcrcwe3-2464094.pdf?src-supplier=Digi-Key, ComponentLink7Description=https://datasheet.ciiva.com/3256/dcrcwe3-3256638.pdf?src-supplier=Avnet, ComponentLink7URL=https://datasheet.ciiva.com/3256/dcrcwe3-3256638.pdf?src-supplier=Avnet, ComponentLink8Description=https://datasheet.ciiva.com/2464/dcrcwe3-2464095.pdf?src-supplier=Digi-Key, ComponentLink8URL=https://datasheet.ciiva.com/2464/dcrcwe3-2464095.pdf?src-supplier=Digi-Key, ComponentLink9Description=https://datasheet.ciiva.com/3256/dcrcwe3-3256639.pdf?src-supplier=Avnet, ComponentLink9URL=https://datasheet.ciiva.com/3256/dcrcwe3-3256639.pdf?src-supplier=Avnet, Composition="Thick Film", Contact Plating=Tin, Depth=0.5mm, Features="Automotive AEC-Q200", Height=0.016inch, Length=1mm, Manufacturer Part Number 1=CRCW040253K6FKED, Military Standard=Not, Number of Pins=2, Number of Terminations=2, Packaging="Tape and Reel", Power Rating=63mW, Pricing 1="1=0.10000, 10=0.03800, 100=0.01540, 1000=0.00690, 2500=0.00599, 5000=0.00495 (USD)", Radiation Hardening=No, REACH SVHC=Unknown, RoHS=Yes, Stock 1=82953, Supplier 1=Digi-Key, Weight=2.3E-05oz, Width=0.5mm
R54: library part CRCW040239K2FKED, "RES SMD 39.2K OHM 1% 1/16W 0402", Case/Package=0402, Case Code (Metric)=1005, Manufacturer 1=Vishay, Max Operating Temperature=155°C, Max Power Dissipation=63mW, Min Operating Temperature=-55°C, Package Quantity=10, Resistance=39.2kR, Supplier Part Number 1=541-39.2KLCT-ND, Temperature Coefficient=100ppm/°C, Tolerance=1%, Voltage Rating=50V, Case Code (Imperial)=0402, ComponentLink1Description=https://datasheet.ciiva.com/11818/0900766b80d98824-11818068.pdf?src-supplier=RSComponents, ComponentLink1URL=https://datasheet.ciiva.com/11818/0900766b80d98824-11818068.pdf?src-supplier=RSComponents, ComponentLink2Description=https://datasheet.ciiva.com/16882/dcrcwe3-16882152.pdf?src-supplier=Avnet+Europe, ComponentLink2URL=https://datasheet.ciiva.com/16882/dcrcwe3-16882152.pdf?src-supplier=Avnet+Europe, ComponentLink3Description=https://datasheet.ciiva.com/2463/dcrcwe3-2463561.pdf?src-supplier=Digi-Key, ComponentLink3URL=https://datasheet.ciiva.com/2463/dcrcwe3-2463561.pdf?src-supplier=Digi-Key, ComponentLink4Description=https://datasheet.ciiva.com/3256/dcrcwe3-3256469.pdf?src-supplier=Avnet, ComponentLink4URL=https://datasheet.ciiva.com/3256/dcrcwe3-3256469.pdf?src-supplier=Avnet, ComponentLink5Description=https://datasheet.ciiva.com/2463/dcrcwe3-2463559.pdf?src-supplier=Digi-Key, ComponentLink5URL=https://datasheet.ciiva.com/2463/dcrcwe3-2463559.pdf?src-supplier=Digi-Key, ComponentLink6Description=https://datasheet.ciiva.com/2463/dcrcwe3-2463560.pdf?src-supplier=Digi-Key, ComponentLink6URL=https://datasheet.ciiva.com/2463/dcrcwe3-2463560.pdf?src-supplier=Digi-Key, ComponentLink7Description=https://datasheet.ciiva.com/16774/70201119-16774809.pdf?src-supplier=Allied+Electronics, ComponentLink7URL=https://datasheet.ciiva.com/16774/70201119-16774809.pdf?src-supplier=Allied+Electronics, ComponentLink8Description=https://datasheet.ciiva.com/22869/70201119-22869593.pdf?src-supplier=Allied+Electronics, ComponentLink8URL=https://datasheet.ciiva.com/22869/70201119-22869593.pdf?src-supplier=Allied+Electronics, ComponentLink9Description=https://datasheet.ciiva.com/16429/dcrcwe3-16429962.pdf?src-supplier=Future+Electronics, ComponentLink9URL=https://datasheet.ciiva.com/16429/dcrcwe3-16429962.pdf?src-supplier=Future+Electronics, ComponentLink10Description=https://datasheet.ciiva.com/7671/1697337-7671596.pdf?src-supplier=Element14, ComponentLink10URL=https://datasheet.ciiva.com/7671/1697337-7671596.pdf?src-supplier=Element14, ComponentLink11Description=https://datasheet.ciiva.com/7671/1533075-7671772.pdf?src-supplier=Element14, ComponentLink11URL=https://datasheet.ciiva.com/7671/1533075-7671772.pdf?src-supplier=Element14, Composition="Thick Film", Contact Plating=Tin, Depth=0.5mm, Features="Automotive AEC-Q200", Height=0.35mm, Lead Free="Lead Free", Length=1mm, Manufacturer Part Number 1=CRCW040239K2FKED, Military Standard=Not, Number of Pins=2, Number of Terminations=2, Packaging="Tape and Reel", Power Rating=63mW, Pricing 1="1=0.10000, 10=0.03800, 100=0.01540, 1000=0.00690, 2500=0.00599, 5000=0.00495 (USD)", Radiation Hardening=No, REACH SVHC=Unknown, RoHS=Yes, Stock 1=46258, Supplier 1=Digi-Key, Termination=SMD/SMT, Voltage Rating (DC)=50V, Weight=2.3E-05oz, Width=0.5mm
TP1 TP2 TP3 TP4 TP5 TP6 TP50 TP51 TP52 TP53 TP55 TP56 TP57 TP58 TP59: library part TEST_POINT
U51: "IC REG LINEAR 1.8V 200MA SC70-5 Linear Voltage Regulator IC  1 Output  200mA SC-70-5", Case/Package=SC, Dropout Voltage=175mV, Manufacturer 1="Texas Instruments", Manufacturer Part Number 1=TLV70018DCKR, Manufacturer Part Number 2=TLV70018DCKT, Max Input Voltage=5.5V, Max Operating Temperature=125°C, Max Output Current=200mA, Max Output Voltage=1.8V, Max Power Dissipation=320mW, Min Current Limit=220mA, Min Input Voltage=2V, Min Operating Temperature=-40°C, Nominal Supply Current=31uA, Output Voltage Accuracy=2%, Package Quantity=1, Quiescent Current=30uA, Supplier Part Number 1=296-32409-1-ND, Accuracy=2%, ComponentLink1Description=https://datasheet.ciiva.com/41462/001014631-da-01-en-ic-reg-ldo-1-8v-0-tlv70018dckr-sot-5-tid-41462480.pdf?src-supplier=Conrad, ComponentLink1URL=https://datasheet.ciiva.com/41462/001014631-da-01-en-ic-reg-ldo-1-8v-0-tlv70018dckr-sot-5-tid-41462480.pdf?src-supplier=Conrad, ComponentLink2Description=https://datasheet.ciiva.com/22700/1882059-22700171.pdf?src-supplier=Element14, ComponentLink2URL=https://datasheet.ciiva.com/22700/1882059-22700171.pdf?src-supplier=Element14, ComponentLink3Description=https://datasheet.ciiva.com/14149/tlv700-eng-ds-14149837.pdf?src-supplier=Distrelec, ComponentLink3URL=https://datasheet.ciiva.com/14149/tlv700-eng-ds-14149837.pdf?src-supplier=Distrelec, ComponentLink4Description=https://datasheet.ciiva.com/7992/1882059-7992894.pdf?src-supplier=Element14, ComponentLink4URL=https://datasheet.ciiva.com/7992/1882059-7992894.pdf?src-supplier=Element14, Contact Plating=Gold, Height=1mm, Lead Free="Lead Free", Length=2.15mm, Manufacturer 2="Texas Instruments", Min Output Voltage=1.8V, Nominal Output Voltage=1.8V, Number of Outputs=1, Number of Pins=5, Number of Regulators=1, Output Current=200mA, Output Type=Fixed, Output Voltage=1.8V, Packaging="Tape and Reel", Polarity=Positive, Power Dissipation=320mW, Power Rating=320mW, Pricing 1="1=0.48000, 10=0.40900, 100=0.30570, 500=0.24020, 1000=0.18561 (USD)", Pricing 2="1=0.55000, 10=0.46700, 100=0.34900 (USD)", Radiation Hardening=No, REACH SVHC="No SVHC", RoHS=Yes, Stock 1=63905, Stock 2=13188, Supplier 1=Digi-Key, Supplier 2=Digi-Key, Supplier Part Number 2=296-25269-1-ND, Width=1.4mm
U52: "IC REG BUCK ADJ 1.2A SYNC 8WSON", Manufacturer 1="Texas Instruments", Manufacturer Part Number 1=TLV62080DSGR, Manufacturer Part Number 2=TLV62080DSGT, Max Input Voltage=5.5V, Max Operating Temperature=125°C, Max Output Current=1.2A, Max Output Voltage=4V, Min Input Voltage=2.5V, Min Operating Temperature=-40°C, Min Output Voltage=500mV, Nominal Supply Current=30uA, Package Quantity=3000, Supplier Part Number 1=296-39270-1-ND, Switching Frequency=2MHz, ComponentLink1Description=https://datasheet.ciiva.com/6604/tlv62080-6604087.pdf?src-supplier=Digi-Key, ComponentLink1URL=https://datasheet.ciiva.com/6604/tlv62080-6604087.pdf?src-supplier=Digi-Key, ComponentLink2Description=https://datasheet.ciiva.com/14378/tlv62080-14378282.pdf?src-supplier=Avnet, ComponentLink2URL=https://datasheet.ciiva.com/14378/tlv62080-14378282.pdf?src-supplier=Avnet, ComponentLink3Description=https://datasheet.ciiva.com/29732/tlv62080-29732147.pdf?src-supplier=Digi-Key, ComponentLink3URL=https://datasheet.ciiva.com/29732/tlv62080-29732147.pdf?src-supplier=Digi-Key, ComponentLink4Description=https://datasheet.ciiva.com/29732/tlv62080-29732156.pdf?src-supplier=Digi-Key, ComponentLink4URL=https://datasheet.ciiva.com/29732/tlv62080-29732156.pdf?src-supplier=Digi-Key, ComponentLink5Description=https://datasheet.ciiva.com/29732/tlv62080-29732151.pdf?src-supplier=Digi-Key, ComponentLink5URL=https://datasheet.ciiva.com/29732/tlv62080-29732151.pdf?src-supplier=Digi-Key, ComponentLink6Description=https://datasheet.ciiva.com/14378/tlv62080-14378283.pdf?src-supplier=Avnet, ComponentLink6URL=https://datasheet.ciiva.com/14378/tlv62080-14378283.pdf?src-supplier=Avnet, ComponentLink7Description=https://datasheet.ciiva.com/26104/tlv62080-26104460.pdf?src-supplier=Avnet+Europe, ComponentLink7URL=https://datasheet.ciiva.com/26104/tlv62080-26104460.pdf?src-supplier=Avnet+Europe, Contact Plating=Gold, Lead Free="Lead Free", Manufacturer 2="Texas Instruments", Min Supply Voltage=2.5V, Mount="Surface Mount", Number of Outputs=1, Number of Pins=8, Output Configuration=Positive, Output Current=1.2A, Output Type=Adjustable, Output Voltage=4V, Packaging="Tape and Reel", Pricing 1="1=1.35000, 10=1.20300, 100=0.93810, 500=0.77498, 1000=0.61182 (USD)", Pricing 2="1=1.48000, 10=1.32700, 100=1.06620 (USD)", Quiescent Current=30uA, Radiation Hardening=No, REACH SVHC="No SVHC", RoHS=Yes, Stock 1=93781, Stock 2=6366, Supplier 1=Digi-Key, Supplier 2=Digi-Key, Supplier Part Number 2=296-36759-1-ND, Synchronous Rectifier=Yes
U53: "IC REG LINEAR 2.8V 200MA SC70-5 Linear Voltage Regulator IC  1 Output  200mA SC-70-5", Case/Package=SC, Dropout Voltage=175mV, Manufacturer 1="Texas Instruments", Manufacturer Part Number 1=TLV70028DCKT, Manufacturer Part Number 2=TLV70028DCKR, Max Input Voltage=5.5V, Max Operating Temperature=125°C, Max Output Current=200mA, Max Output Voltage=2.8V, Max Power Dissipation=320mW, Min Current Limit=220mA, Min Input Voltage=2V, Min Operating Temperature=-40°C, Nominal Supply Current=31uA, Output Voltage Accuracy=2%, Package Quantity=1, Quiescent Current=30uA, Supplier Part Number 1=296-25271-1-ND, Accuracy=2%, ComponentLink1Description=https://datasheet.ciiva.com/14149/tlv700-eng-ds-14149840.pdf?src-supplier=Distrelec, ComponentLink1URL=https://datasheet.ciiva.com/14149/tlv700-eng-ds-14149840.pdf?src-supplier=Distrelec, ComponentLink2Description=https://datasheet.ciiva.com/22700/1882059-22700172.pdf?src-supplier=Element14, ComponentLink2URL=https://datasheet.ciiva.com/22700/1882059-22700172.pdf?src-supplier=Element14, ComponentLink3Description=http://components.arrow.com/part/dataview/0323_00585634?src-supplier=Arrow+Europe, ComponentLink3URL=http://components.arrow.com/part/dataview/0323_00585634?src-supplier=Arrow+Europe, ComponentLink4Description=http://focus.ti.com/lit/ds/symlink/tlv70033.pdf?src-supplier=Avnet+Europe, ComponentLink4URL=http://focus.ti.com/lit/ds/symlink/tlv70033.pdf?src-supplier=Avnet+Europe, ComponentLink5Description=http://www.ti.com/lit/ds/slvsa00d/slvsa00d.pdf?src-supplier=Digi-Key, ComponentLink5URL=http://www.ti.com/lit/ds/slvsa00d/slvsa00d.pdf?src-supplier=Digi-Key, ComponentLink6Description=http://www.ti.com/lit/pdf/slyy050?src-supplier=Digi-Key, ComponentLink6URL=http://www.ti.com/lit/pdf/slyy050?src-supplier=Digi-Key, ComponentLink7Description=http://www.ti.com/general/docs/lit/getliterature.tsp?genericPartNumber=TLV700&&fileType=pdf&src-supplier=Avnet+Asia, ComponentLink7URL=http://www.ti.com/general/docs/lit/getliterature.tsp?genericPartNumber=TLV700&&fileType=pdf&src-supplier=Avnet+Asia, ComponentLink8Description=http://www.ti.com/general/docs/lit/getliterature.tsp?genericPartNumber=TLV700&&fileType=pdf&src-supplier=Avnet, ComponentLink8URL=http://www.ti.com/general/docs/lit/getliterature.tsp?genericPartNumber=TLV700&&fileType=pdf&src-supplier=Avnet, ComponentLink9Description=http://components.arrow.com/part/dataview/48329233S8322732N7713?src-supplier=Arrow, ComponentLink9URL=http://components.arrow.com/part/dataview/48329233S8322732N7713?src-supplier=Arrow, ComponentLink10Description=http://www.ti.com/litv/slvsa00d?src-supplier=Mouser, ComponentLink10URL=http://www.ti.com/litv/slvsa00d?src-supplier=Mouser, ComponentLink11Description=http://www.ti.com/lit/ds/slvsa00e/slvsa00e.pdf?src-supplier=Digi-Key, ComponentLink11URL=http://www.ti.com/lit/ds/slvsa00e/slvsa00e.pdf?src-supplier=Digi-Key, Contact Plating=Gold, Height=1mm, Lead Free="Lead Free", Length=2.15mm, Manufacturer 2="Texas Instruments", Max Supply Voltage=5.5V, Min Output Voltage=2.8V, Min Supply Voltage=2V, Nominal Output Voltage=2.8V, Number of Outputs=1, Number of Pins=5, Number of Regulators=1, Output Current=200mA, Output Type=Fixed, Output Voltage=2.8V, Packaging="Tape and Reel", Polarity=Positive, Power Dissipation=320mW, Power Rating=320mW, Pricing 1="1=0.55000, 10=0.46700, 100=0.34900 (USD)", Pricing 2="1=0.48000, 10=0.40900, 100=0.30570, 500=0.24020, 1000=0.18561 (USD)", Radiation Hardening=No, REACH SVHC="No SVHC", RoHS=Yes, Stock 1=832, Stock 2=30013, Supplier 1=Digi-Key, Supplier 2=Digi-Key, Supplier Part Number 2=296-39279-1-ND, Termination=SMD/SMT, Width=1.4mm

## Via types
v1: diameter 0.41, hole 0.2, Top Copper to Bottom Layer, tented both sides, 101 vias
v2: diameter 0.4, hole 0.2, Top Copper to Bottom Layer, tented both sides, 20 vias
v3: diameter 0.508, hole 0.254, Top Copper to Bottom Layer, tented both sides, 18 vias
v4: diameter 0.406, hole 0.203, Top Copper to Bottom Layer, 2 vias

## Nets (pads, with @x,y where several pads share a name; then routed paths per layer and width w, separated by ;. In a path a pad name is that pad's centre, name@x,y a point inside that pad or via, vN(x,y) a via of type N, cw(c..) or ccw(c..) an arc to the next point about the centre after c; other vN are vias at no path point)
1.8V: C54.2 FB51.1 U51.5 | length 4.1
  Top Copper w0.381: FB51.1 -10.42,4.92 -10.42,4.03 -10.457,3.993 -10.503,3.993 C54.2 -10.42,3 -10.225,2.805 -10.03,2.61 U51.5
2.8V: C58.2 FB52.1 U53.5 | length 6.3
  Top Copper w0.3: U53.5 9.837,5.875 9.837,6.512 9.877,6.552 9.877,7.03 C58.2
  Top Copper w0.381: FB52.1@7.975,11.125 8.241,10.859 8.241,8.987 C58.2
3V3: C53.2 C55.2 C57.2 J1.1 J1.2 U51.1 U51.3 U52.1 U52.8 U53.1 U53.3 | length 17.4
  Top Copper w0.254: v3(-6.325,-4.487) -6.273,-4.539 J1.1@-6.273,-5.825 ; v3(-6.304,-7.116) -6.304,-7.074 -6.24,-7.011 J1.1@-6.24,-5.761 ; J1.2@-5.778,-5.819 v3@-5.778,-4.54 ; J1.2@-5.745,-5.756 -5.745,-7.06 -5.71,-7.095 v3(-5.71,-7.138)
  Top Copper w0.3: v3(-11.937,0.112) C53.2 ; C53.2@-11.31,-0.01 -11.31,1.33 -11.28,1.36 -11.804,1.36 -11.93,1.486 -11.93,2.484 -11.754,2.66 -11.28,2.66 U51.1 ; v3@-5.778,-4.54 -5.778,-4.484 -5.66,-4.365 -5.66,-4.023 C55.2 -5.44,-3.802 -5.44,-3.465 -5.214,-3.24 ; U52.8 -5.41,-2.87 -5.4,-2.88 -5.4,-3.054 -5.214,-3.24 ; U52.1 -3.69,-2.87 -3.7,-2.88 -3.7,-2.962 -3.978,-3.24 -5.214,-3.24 ; U53.1 9.837,3.575 9.837,2.988 9.988,2.838 ; v3(10.012,1.7) C57.2 9.988,2.312 9.988,2.838 ; U53.3 11.037,3.575 11.037,3.221 10.741,2.925 10.075,2.925 9.988,2.838
  other v3: -5.726,-4.487
C_1.05V: C1.2 C2.2 FB50.2 J2.15 TP50.1 | length 9.5
  Top Copper w0.2: -3.894,10.05 -3.854,10.01 -2.81,10.01 -2.8,10 J2.15
  Top Copper w0.381: FB50.2 -8.312,6.838 -8.312,7.568 C2.2@-6.229,9.65 ; C2.2 -6.105,9.775 -5.317,9.775 -5.026,10.067 -4.98,10.067 C1.2@-4.96,10.086 ; C1.2 C1.2@-4.96,10.086 ; -3.894,10.05 -4.733,10.05 -4.75,10.067 -4.941,10.067 C1.2@-4.96,10.086
  Bottom Layer w0.127: v1(-3.425,10) -3.425,10.009 -3.15,10.284 TP50.1 TP50.1@-3.15,11.275
  Bottom Layer w0.2: TP50.1@-3.15,11.275 TP50.1@-2.997,11.122
C_1.8V: C3.2 C4.2 FB51.2 J2.13 TP51.1 | length 13.5
  Top Copper w0.2: C3.2@-2.781,11.37 C3.2@-2.671,11.26 ; C3.2@-2.717,11.224 -2.587,11.224 -2.228,10.866 -2.062,10.866 -2.013,10.816 v1@-2.013,10.808 ; J2.13 -1.99,9.98 -1.99,10.199 -1.963,10.226 -1.963,10.823 v1(-1.965,10.826)
  Top Copper w0.381: FB51.2 -10.37,7.689 -9.521,7.689 -8.044,9.166 -8.044,10.28 -7.784,10.541 -7.49,10.541 C4.2 v3@-6.909,11.121
  Layer 1 w0.381: v3(-6.922,11.128) -6.69,11.36 -5.185,11.36 -4.588,10.763 -2.987,10.763 -2.788,10.963 -2.341,10.963 -2.275,10.897 -2.035,10.897 v1@-1.975,10.837
  Bottom Layer w0.104: v3(-6.922,11.128) TP51.1
C_2.8V: C5.2 C6.2 FB52.2 J2.11 J2.18 TP53.1 | length 13.9
  Top Copper w0.2: J2.18 -2,7.038 v1(-1.998,7.035) ; J2.11 -1.2,10.298 -1.068,10.43 v1@-1.068,10.74 ; v1@-0.898,10.782 -0.898,11.157 C5.2@-0.829,11.226
  Top Copper w0.381: C5.2@-0.886,11.375 C6.2 ; C6.2@3.094,11.255 3.094,10.877 3.198,10.774 FB52.2 FB52.2@5.924,10.731
  Bottom Layer w0.102: TP53.1@0.657,11.184 0.751,11.278 v1@1.328,11.278
  Bottom Layer w0.2: v1(-1.998,7.035) -1.998,9.336 -0.991,10.343 v1@-0.991,10.718 ; TP53.1@0.575,11.225 0.657,11.225 TP53.1@0.657,11.184
  other v1: -0.898,10.803 1.388,11.338
CAM_CLK: D3.5 D3.6 J1.9 J2.30 TP3.1 | length 38.9
  Top Copper w0.102: v1(-1.5,-1.95) -1.641,-1.95 -2.25,-2.559 D3.5 D3.6 -2.25,-4.297 J1.9 -2.25,-7.375 -0.512,-9.112 2.862,-9.112 v1(3.75,-10) ; J2.30 2.8,7.485 2.86,7.425 3.384,7.425 v1(3.736,7.778)
  Layer 1 w0.102: v1(-1.5,-1.95) -0.425,-1.95 0.673,-0.852 0.673,1.382 -0.26,2.315 -4.918,2.315 -5.688,3.085 -5.688,3.343 -5.688,5.622 -4.665,6.645 -0.78,6.645 0.102,7.527 3.485,7.527 3.735,7.778 v1(3.736,7.778)
CAM_RST: D3.4 D3.7 J1.10 J2.23 R1.1 TP4.1 | length 37.3
  Top Copper w0.102: v1(-1.737,-2.55) -1.75,-2.562 D3.4 D3.7 -1.75,-4.701 -1.75,-5.751 -1.708,-5.793 -1.708,-7.22 -0.241,-8.688 4.938,-8.688 v1(6.25,-10) ; v1(-0.154,6.556) -0.194,6.596 -0.194,7.203 -0.139,7.257 -0.139,7.311 -0.079,7.371 -0.059,7.371 0,7.43 J2.23 ; v1(0.8,2.163) R1.1 R1.1@1.486,2.098
  Layer 1 w0.102: v1(-1.737,-2.55) -1.596,-2.55 -1.266,-2.219 -0.107,-2.219 0.875,-1.238 0.875,1.592 0.448,2.018 ; v1(-0.154,6.556) -0.519,6.556 -0.632,6.443 -4.581,6.443 -5.486,5.538 -5.486,3.169 -4.834,2.517 -0.05,2.517 0.448,2.018 ; v1(0.8,2.163) 0.741,2.103 0.534,2.103 0.448,2.018
FSIN: J1.4 TP2.1 | length 4.8
  Top Copper w0.102: J1.4@-4.75,-5.751 -4.75,-9.33 -4.105,-9.975 v1(-3.775,-9.975)
GND: C1.1 C2.1 C3.1 C4.1 C5.1 C6.1 C53.1 C54.1 C55.1 C56.1 C57.1 C58.1 D1.3 D1.8 D2.3 D2.8 D3.3 D3.8 J1.5 J1.8 J1.11 J1.14 J1.17 J1.20 J1.23 J1.26 J1.MP1 J1.MP2 J2.1 J2.4 J2.7 J2.10 J2.12 J2.14 J2.17 J2.24 J2.29 R1.2 R54.1 TP52.1 TP55.1 TP56.1 TP57.1 TP58.1 TP59.1 U51.2 U52.2 U52.3 U52.9 U53.2 | length 50.8
  Top Copper w0.102: v1(1.55,0.562) R1.2 ; v1(1.6,9.462) J2.4
  Top Copper w0.104: J2.10 J2.10@-0.766,10.004 ; v1@-0.42,10.682 -0.406,10.682 v1(-0.352,10.682) ; v1(2.8,9.462) J2.1
  Top Copper w0.127: J2.10@-0.766,10.004 -0.754,10.017 -0.754,10.334 v1@-0.406,10.682 ; v1(0.201,6.95) 0.201,6.981 0.4,7.18 J2.24 ; v1(0.4,9.462) J2.7 ; J2.29 2.4,7.761 2.622,7.983 3.048,7.983 3.148,7.883 v1(3.215,7.883)
  Top Copper w0.2: v1(-5.446,0.588) R54.1 ; v1(-2.508,7.035) -2.508,7.092 -2.41,7.19 -2.41,7.56 J2.17 ; v1(-2.418,10.422) -2.409,10.414 -2.409,9.979 J2.14 ; J2.12 -1.6,10.47 v1(-1.5,10.571)
  Top Copper w0.254: v3(-11.914,3.91) C54.1 ; U51.2 v3(-10.505,1.96) ; C53.1 v3(-9.838,0.112) ; C4.1 -7.361,9.769 -6.812,9.769 v1(-6.803,9.778) ; v3(-6.841,-0.759) -6.772,-0.759 -6.586,-0.573 -6.363,-0.573 -6.04,-0.25 C56.1 ; v3(-6.584,0.344) -6.561,0.344 -6.39,0.173 -6.363,0.173 -6.04,-0.15 C56.1 ; C2.1 -5.927,10.487 -5.739,10.487 -5.552,10.3 v1(-5.513,10.3) ; v3(-6.004,0.685) -6.004,-0.164 C56.1 ; v1(-5.463,10.837) -4.999,10.837 C1.1@-4.944,10.782 ; C55.1 -4.589,-3.874 -4.068,-3.874 v1(-4.056,-3.885) ; v1(-4.25,-6.957) -4.25,-5.751 v1(-4.25,-4.545) ; v1(-3.981,11.283) -3.331,11.283 C3.1@-3.295,11.319 ; v3(-3.203,-2.37) -4.3,-2.37 U52.9 -4.3,-1.87 -3.49,-1.87 -3.357,-1.737 -3.256,-1.737 -3.058,-1.539 -3.058,-1.184 v3(-3.009,-1.135) ; J1.8@-2.75,-5.751 v1(-2.75,-4.545) ; v1(-2.07,11.393) -2.055,11.378 -1.582,11.378 C5.1@-1.568,11.363 ; J1.11@-1.25,-5.751 v1(-1.25,-4.545) D3.8 D3.3 -1.238,-3.118 -1.238,-2.713 v1(-1.162,-2.637) ; J1.14@0.25,-5.751 v1(0.25,-4.545) ; J1.17@1.75,-5.751 v1(1.75,-4.545) v1(1.75,-2.55) ; J1.20@3.25,-5.751 v1(3.25,-4.545) ; C6.1@4.02,11.387 v1(4.544,11.387) ; J1.23@4.75,-5.751 v1(4.75,-4.545) v1(4.75,-2.55) ; J1.26@6.25,-5.751 v1(6.25,-4.545) ; U53.2 v3(10.438,4.4) ; C57.1 v3(11.575,2.287) ; C58.1 v3(11.547,7.19)